# Altium PCB PA_Channel_SUP_CTRL_v1.1.PcbDoc (part 2 of 2)
Units mil, origin at the board's own origin, x right, y up, seen from the top; angles counter-clockwise.
Board outline 7464.6 x 1234.28 mil, 2 copper layers (Top Layer, Bottom Layer), stack 61.855 mil thick; 26 components, 28 nets, 132 pads, 178 vias.
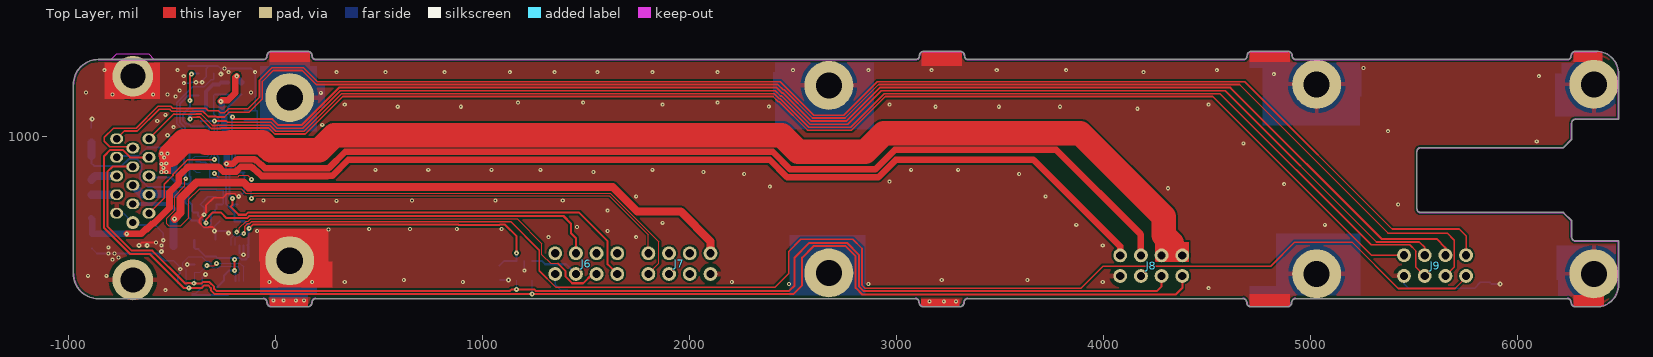
[diagram p0: Top Layer view]

## Silkscreen, mask and mechanical layers (free items; w line width, h text height) (continued)
Mechanical 2: (continued)
  lines w0.5: 289.41,351.3 361.25,351.3 ; 3183.11,351.3 3254.95,351.3 ; 3419.33,351.3 3491.17,351.3 ; 4067.31,682.01 4146.34,682.01 ; 4076.96,1170.2 4144.57,1170.2 ; 4765.79,351.3 4837.63,351.3 ; 4994.14,351.3 5065.98,351.3 ; 6332.72,351.3 6404.56,351.3 ; 6496.59,319.8 cw(c6378.48,319.8) 6378.48,201.69 6181.63,201.69 ; 6496.59,1264.68 ccw(c6378.48,1264.68) 6378.48,1382.8 6181.63,1382.8 ; -1259.31,4.84 -1259.31,1579.65 ; -1259.31,4.84 -1416.79,4.84 -1416.79,1579.65 -1259.31,1579.65 ; -1259.31,4.84 6614.7,4.84 6614.7,1579.65 -1259.31,1579.65 ; -126.44,212.89 ccw(c-29.55,280.43) -29.55,162.32 168.4,162.32 ccw(c168.4,280.43) 265.29,212.89 ; -126.44,212.89 ccw(c-176.64,319.8) -58.53,319.8 -58.53,1264.68 ccw(c-176.64,1264.68) -126.44,1371.6 ; -126.44,212.89 cw(c-176.64,319.8) -176.64,201.69 -393.17,201.69 cw(c-481.21,280.43) -481.21,162.32 -944.35,162.32 cw(c-944.35,280.43) -1062.46,280.43 -1062.46,1304.06 cw(c-944.35,1304.06) -944.35,1422.17 -481.21,1422.17 cw(c-481.21,1304.06) -393.17,1382.8 -176.64,1382.8 cw(c-176.64,1264.68) -126.44,1371.6 ; -126.44,1371.6 cw(c-29.55,1304.06) -29.55,1422.17 168.4,1422.17 cw(c168.4,1304.06) 265.29,1371.6 ; 197.38,824.26 cw(c266.28,920.2) 148.17,920.2 148.17,930.04 cw(c266.28,930.04) 197.38,1025.97 ; 197.38,824.26 ccw(c266.28,920.2) 266.28,802.09 522.18,802.09 ccw(c522.18,920.2) 640.29,920.2 640.29,930.04 ccw(c522.18,930.04) 522.18,1048.15 266.28,1048.15 ccw(c266.28,930.04) 197.38,1025.97 ; 197.38,824.26 197.38,319.8 ccw(c315.49,319.8) 265.29,212.89 ; 197.38,1025.97 197.38,1264.68 cw(c315.49,1264.68) 265.29,1371.6 ; 265.29,212.89 ccw(c315.49,319.8) 315.49,201.69 3032.02,201.69 ; 265.29,1371.6 cw(c315.49,1264.68) 315.49,1382.8 3032.02,1382.8 ; 3032.02,201.69 ccw(c3120.06,280.43) 3120.06,162.32 3337.69,162.32 ccw(c3337.69,280.43) 3425.72,201.69 ; 3032.02,201.69 3425.72,201.69 ; 3032.02,1382.8 cw(c3120.06,1304.06) 3120.06,1422.17 3337.69,1422.17 cw(c3337.69,1304.06) 3425.72,1382.8 ; 3032.02,1382.8 3425.72,1382.8 ; 3425.72,201.69 4547.77,201.69 ; 3425.72,1382.8 4547.77,1382.8 ; 4547.77,201.69 ccw(c4635.81,280.43) 4635.81,162.32 4853.44,162.32 ccw(c4853.44,280.43) 4941.47,201.69 ; 4547.77,201.69 4941.47,201.69 ; 4547.77,1382.8 cw(c4635.81,1304.06) 4635.81,1422.17 4853.44,1422.17 cw(c4853.44,1304.06) 4941.47,1382.8 ; 4547.77,1382.8 4941.47,1382.8 ; 4941.47,201.69 6181.63,201.69 ; 4941.47,1382.8 6181.63,1382.8 ; 6181.63,201.69 ccw(c6269.66,280.43) 6269.66,162.32 6378.48,162.32 ccw(c6378.48,280.43) 6496.59,280.43 6496.59,625.47 ; 6181.63,1382.8 cw(c6269.66,1304.06) 6269.66,1422.17 6378.48,1422.17 cw(c6378.48,1304.06) 6496.59,1304.06 6496.59,998.39 ; 6496.59,625.47 cw(c6417.85,713.5) 6417.85,595.39 6004.46,595.39 cw(c6004.46,713.5) 5886.35,713.5 5886.35,910.35 cw(c6004.46,910.35) 6004.46,1028.46 6417.85,1028.46 cw(c6417.85,910.35) 6496.59,998.39 ; 6496.59,625.47 ccw(c6417.85,713.5) 6535.96,713.5 6535.96,910.35 ccw(c6417.85,910.35) 6496.59,998.39 ; -889.23,573.97 ccw(c-771.12,573.97) -791.63,457.65 -626.27,428.49 ccw(c-605.76,544.81) -487.65,544.81 -487.65,1049.53 ccw(c-605.76,1049.53) -626.27,1165.85 -791.63,1136.69 ccw(c-771.12,1020.38) -889.23,1020.38 -889.23,573.97
Mechanical 3:
  drawing of 155 lines, arcs and shapes, not listed

## Text inside footprints (layer, text, board x,y; h text height)
J6: Bottom Overlay "1" at 1728.18,423.86 h47.24
J7: Bottom Overlay "1" at 2178.18,423.86 h47.24
J8: Bottom Overlay "1" at 4457.32,414.02 h47.24
J9: Bottom Overlay "1" at 5828.18,414.65 h47.24